# Altium PCB PCB1.PcbDoc
Units mm, origin at the board's own origin, x right, y up, seen from the top; angles counter-clockwise.
Board outline 50 x 100 mm, 2 copper layers (Top Layer, Bottom Layer); 95 components, 45 nets, 266 pads, 16 vias.
Unrouted connection lines stored in the file: 4.
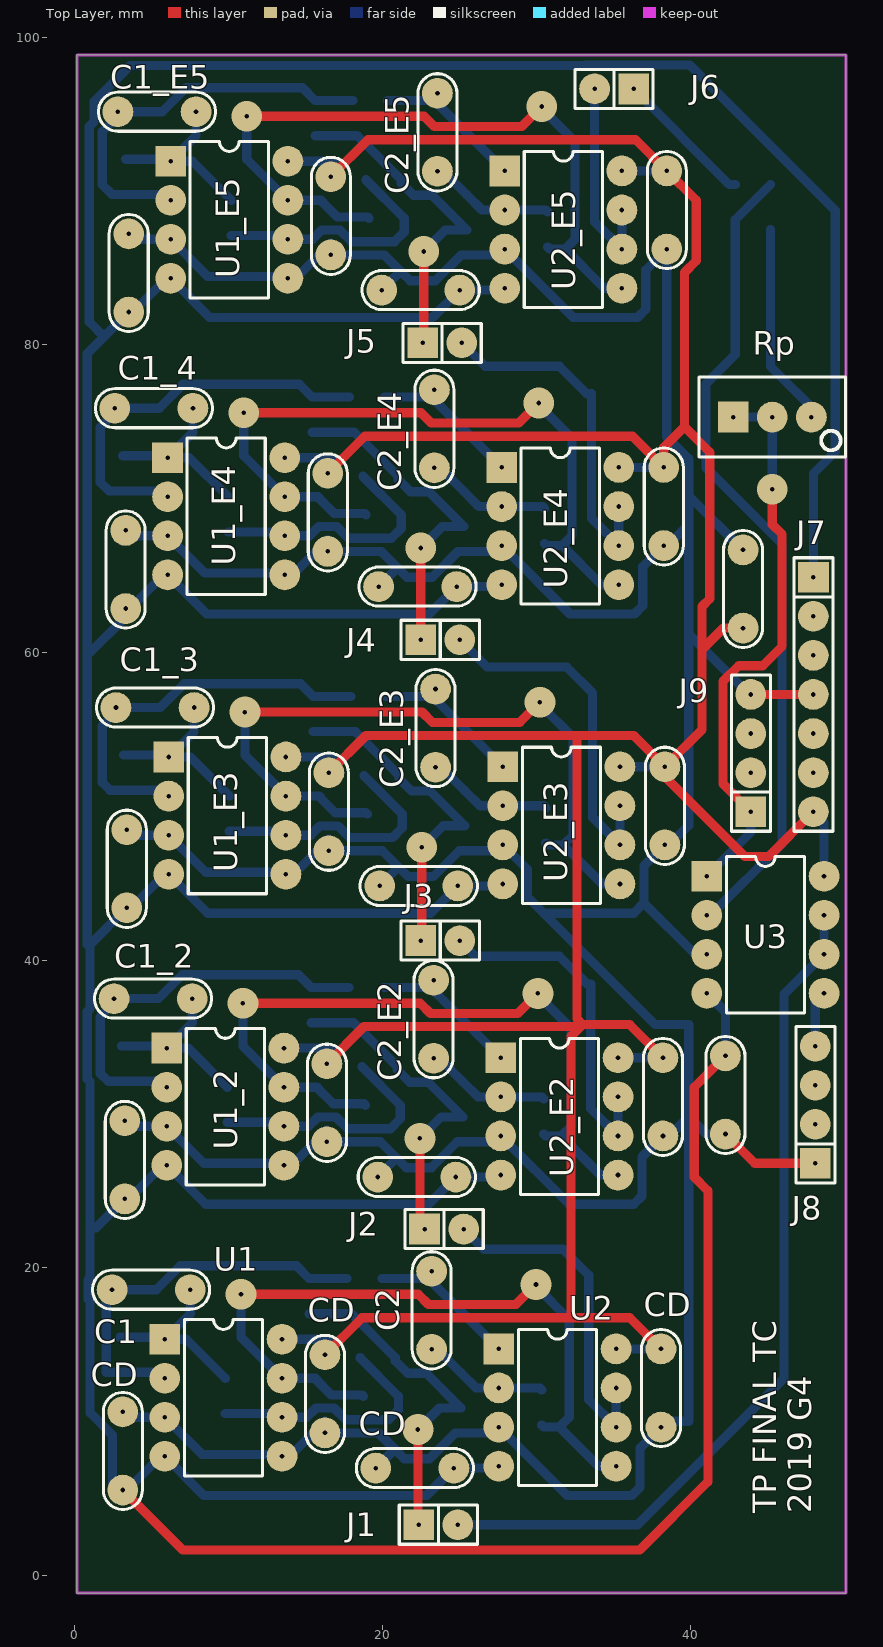
[diagram p0: Top Layer view]
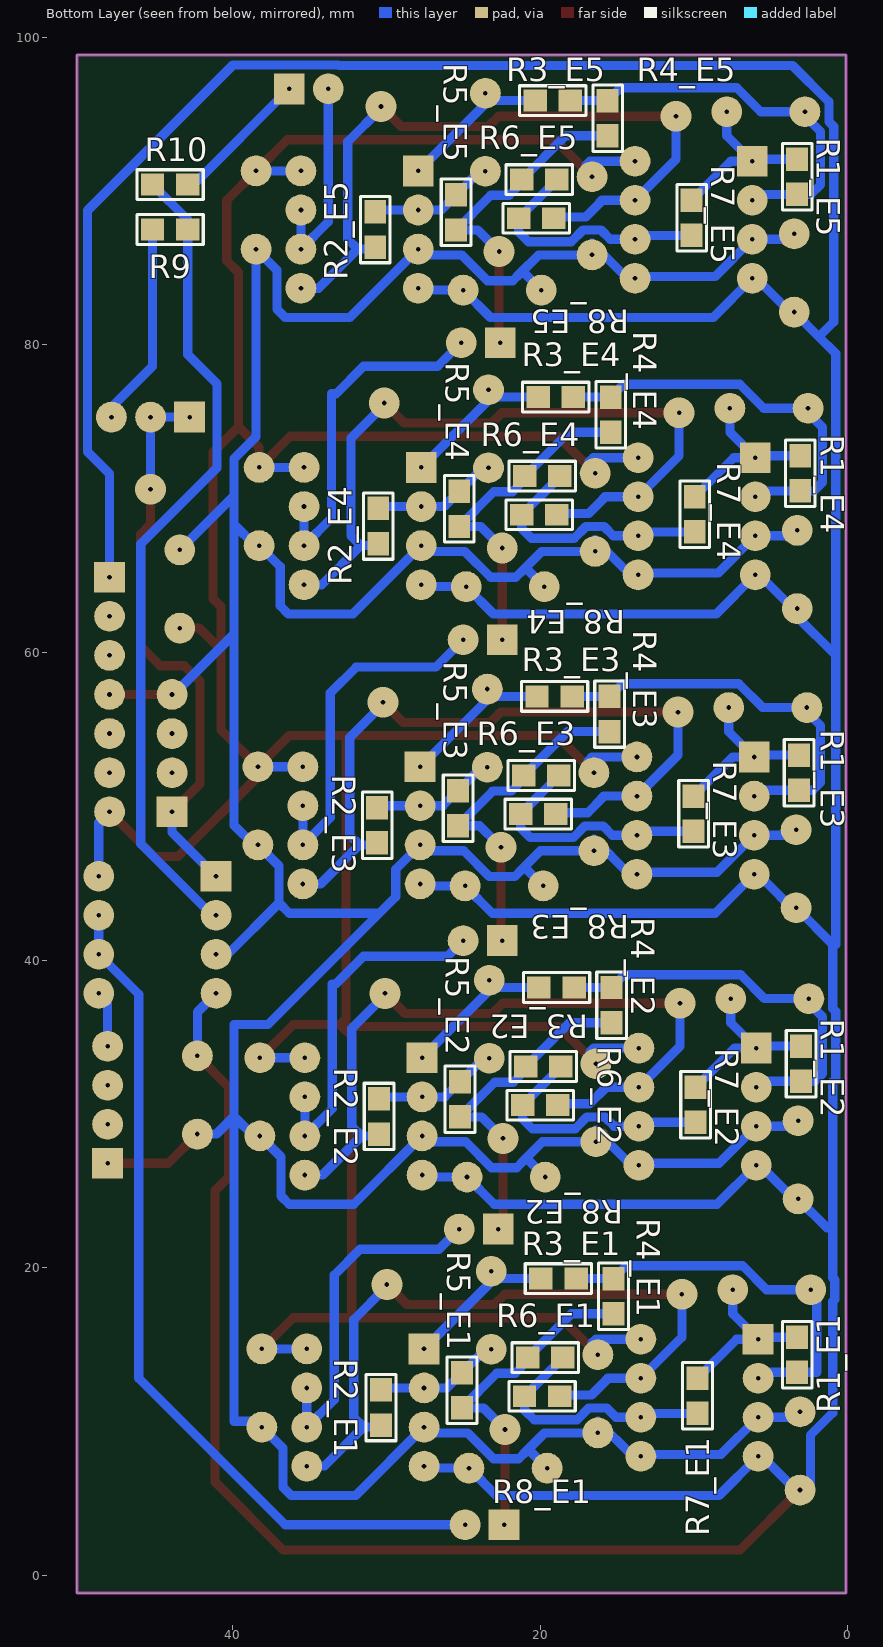
[diagram p1: Bottom Layer view, seen from below]
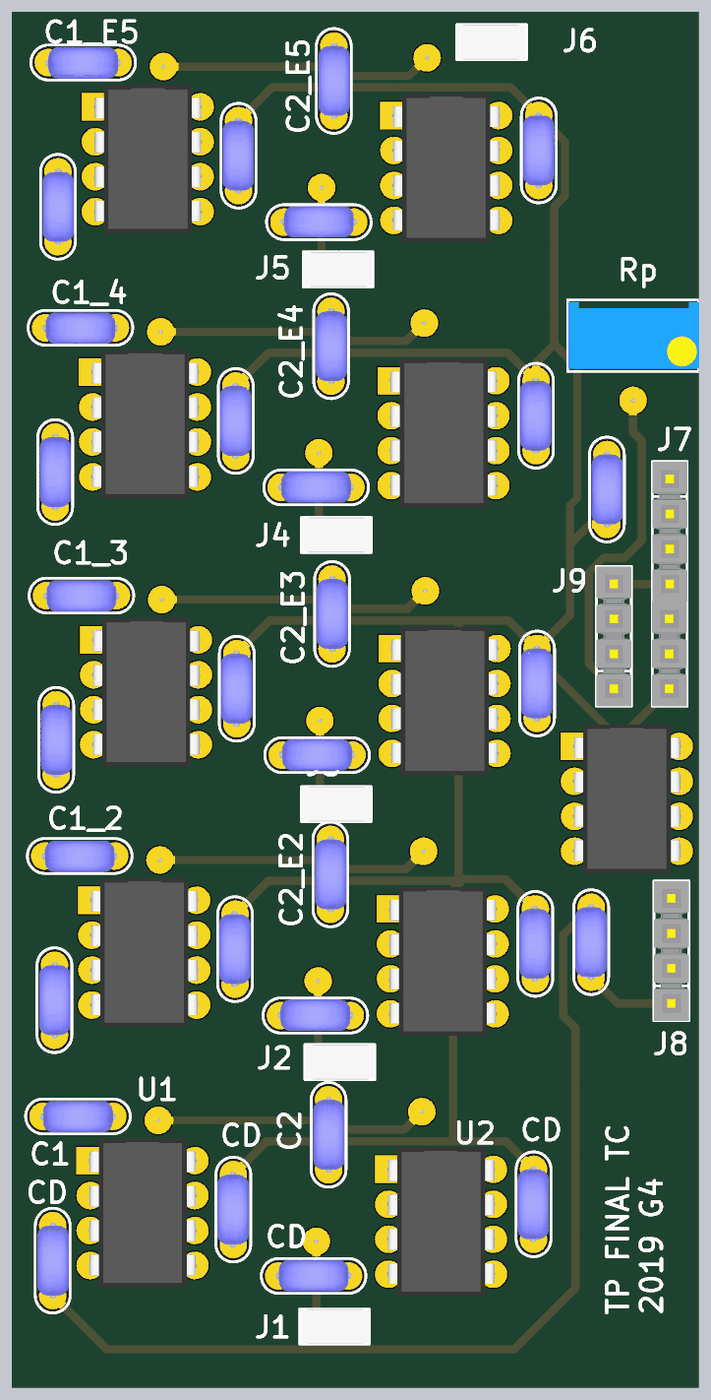
[diagram p2: 3D render of the assembled board from above, using the file's embedded part models]
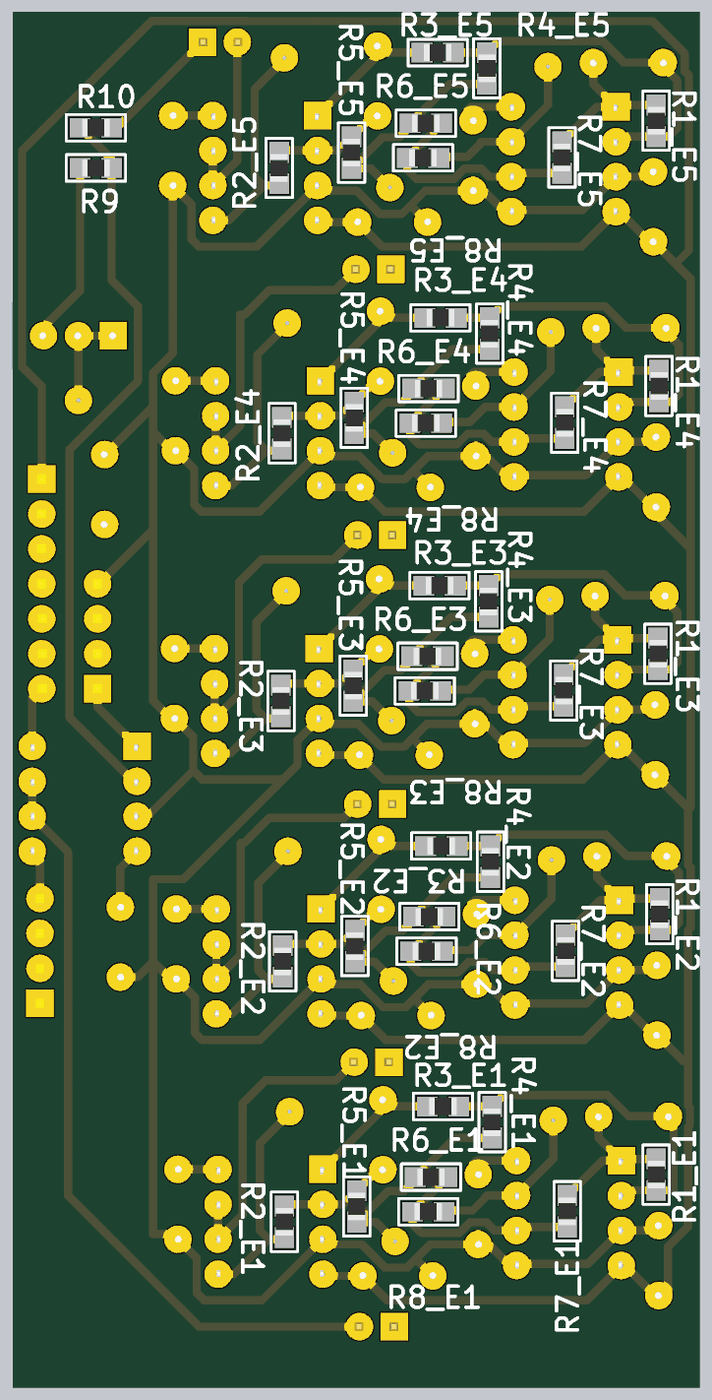
[diagram p3: 3D render of the assembled board from below, using the file's embedded part models]

## Layer stack, top to bottom
Top Solder: solder mask 0.0102, Solder Resist, Dk 3.5
Top Layer: signal copper 0.0356
Dielectric 1: dielectric 0.32, FR-4, Dk 4.8
Bottom Layer: signal copper 0.0356
Bottom Solder: solder mask 0.0102, Solder Resist, Dk 3.5

## Board outline
0.127,-1.143 0.127,98.857 50.127,98.857 50.127,-1.143

## Design rules (kind name [scope] priority, off if disabled: settings)
Clearance [All] p1: gap=0.254 ignorepadtopadclearanceinfootprint=FALSE except(0: Arc-Hole Track-Hole SMDPad-Hole THPad-Hole Via-Hole Fill-Hole Poly-Hole Region-Hole Text-Hole)
PolygonConnect [All] p1: connectstyle=Relief reliefconductorwidth=0.254 reliefentries=4 polygonreliefangle="90 Angle" airgapwidth=0.254
RoomDefinition E5 [InComponentClass('E5')] p1: confinementstyle=ConfineIn formatcopy=TRUE lockcomponents=FALSE outline 0.889,79.375 40.64,79.375 40.64,97.79 0.889,97.79
RoomDefinition E4 [InComponentClass('E4')] p2: confinementstyle=ConfineIn formatcopy=TRUE lockcomponents=FALSE outline 0.889,60.738 40.64,60.738 40.64,79.216 0.889,79.216
RoomDefinition E3 [InComponentClass('E3')] p3: confinementstyle=ConfineIn formatcopy=TRUE lockcomponents=FALSE outline 0.762,41.084 40.513,41.084 40.513,59.055 0.762,59.055
RoomDefinition E2 [InComponentClass('E2')] p4: confinementstyle=ConfineIn formatcopy=TRUE lockcomponents=FALSE outline 0.635,22.066 40.386,22.066 40.386,40.164 0.635,40.164
RoomDefinition E1 [InComponentClass('E1')] p5: confinementstyle=ConfineIn formatcopy=FALSE lockcomponents=FALSE outline 0.635,2.794 40.386,2.794 40.386,21.336 0.635,21.336
RoutingVias [All] p1: holewidth=0.711 width=1.27 viastyle="Through Hole" minholewidth=0.711 minwidth=1.27 maxholewidth=0.711 maxwidth=1.27
SolderMaskExpansion [All] p1: expansion=0.102
Width [All] p1: maxlimit=0.6 minlimit=0.6 preferedwidth=0.6
30 further rules are at their usual default settings.

## Classes and differential pairs
channel class universal_flech: E1 E2 E3 E4 E5
component class Esquemático: J1 J2 J3 J4 J5 J6 J7 J8 J9 R9 R10 Rp U3 ""
component class E5: C1_E5 C2_E5 R1_E5 R2_E5 R3_E5 R4_E5 R5_E5 R6_E5 R7_E5 R8_E5 U1_E5 U2_E5 ""
component class E4: C1_4 C2_E4 R1_E4 R2_E4 R3_E4 R4_E4 R5_E4 R6_E4 R7_E4 R8_E4 U1_E4 U2_E4 ""
component class E3: C1_3 C2_E3 R1_E3 R2_E3 R3_E3 R4_E3 R5_E3 R6_E3 R7_E3 R8_E3 U1_E3 U2_E3 ""
component class E2: C1_2 C2_E2 CD R1_E2 R2_E2 R3_E2 R4_E2 R5_E2 R6_E2 R7_E2 R8_E2 U1 U2_E2 ""
component class E1: C1 C2 CD R1_E1 R2_E1 R3_E1 R4_E1 R5_E1 R6_E1 R7_E1 R8_E1 U1 U2 ""

## Components (designator, comment, footprint, x,y, rotation, side; value= is the part's Value field where it differs from the comment)
C1 "10n" CAP200 4.953,18.581 r0 top
C1_2 "10n" CAP200 5.08,37.504 r0 top (schematic designator C1)
C1_3 "10n" CAP200 5.207,56.427 r0 top (schematic designator C1)
C1_4 "10n" CAP200 5.134,75.887 r0 top (schematic designator C1)
C1_E5 "10n" CAP200 5.334,95.162 r0 top (schematic designator C1)
C2 "10n" CAP200 23.187,17.244 r90 top
C2_E2 "10n" CAP200 23.314,36.167 r90 top (schematic designator C2)
C2_E3 "10n" CAP200 23.441,55.09 r90 top (schematic designator C2)
C2_E4 "10n" CAP200 23.368,74.549 r90 top (schematic designator C2)
C2_E5 "10n" CAP200 23.568,93.825 r90 top (schematic designator C2)
CD "CAP" CAP200 38.1,12.192 r270 top (schematic designator CD4)
CD "CAP" CAP200 16.256,11.811 r270 top (schematic designator CD3)
CD "CAP" CAP200 22.098,6.985 r180 top (schematic designator CD2)
CD "CAP" CAP200 3.116,8.1 r90 top (schematic designator CD1)
CD1 "CAP" CAP200 42.291,31.242 r270 top
CD1 "CAP" CAP200 3.497,84.681 r90 top
CD1 "CAP" CAP200 3.297,65.405 r90 top
CD1 "CAP" CAP200 3.37,45.946 r90 top
CD1 "CAP" CAP200 3.243,27.023 r90 top
CD2 "CAP" CAP200 43.434,64.135 r90 top
CD2 "CAP" CAP200 22.479,83.566 r180 top
CD2 "CAP" CAP200 22.279,64.29 r180 top
CD2 "CAP" CAP200 22.352,44.831 r180 top
CD2 "CAP" CAP200 22.225,25.908 r180 top
CD3 "CAP" CAP200 16.637,88.392 r270 top
CD3 "CAP" CAP200 16.437,69.116 r270 top
CD3 "CAP" CAP200 16.51,49.657 r270 top
CD3 "CAP" CAP200 16.383,30.734 r270 top
CD4 "CAP" CAP200 38.481,88.773 r270 top
CD4 "CAP" CAP200 38.281,69.497 r270 top
CD4 "CAP" CAP200 38.354,50.038 r270 top
CD4 "CAP" CAP200 38.227,31.115 r270 top
J1 "JUMPER" JUMPER2 23.622,3.302 r0 top
J2 "JUMPER" JUMPER2 24.003,22.524 r0 top
J3 "JUMPER" JUMPER2 23.749,41.275 r0 top
J4 "JUMPER" JUMPER2 23.749,60.833 r0 top
J5 "JUMPER" JUMPER2 23.876,80.137 r0 top
J6 "JUMPER" JUMPER2 35.052,96.647 r180 top
J7 "CON7" SIP7 48.006,64.897 r270 top
J8 "CON4" SIP4 48.133,30.607 r90 top
J9 "CON4" SIP4 43.942,53.467 r90 top
R1_E1 "5k6" 0805 3.302,14.351 r90 bottom (schematic designator R1)
R1_E2 "5k6" 0805 3.048,33.274 r90 bottom (schematic designator R1)
R1_E3 "5k6" 0805 3.175,52.197 r90 bottom (schematic designator R1)
R1_E4 "5k6" 0805 3.102,71.656 r90 bottom (schematic designator R1)
R1_E5 "5k6" 0805 3.302,90.932 r90 bottom (schematic designator R1)
R2_E1 "1k5" 0805 30.353,10.922 r90 bottom (schematic designator R2)
R2_E2 "1k5" 0805 30.48,29.845 r90 bottom (schematic designator R2)
R2_E3 "1k5" 0805 30.607,48.768 r90 bottom (schematic designator R2)
R2_E4 "1k5" 0805 30.534,68.227 r90 bottom (schematic designator R2)
R2_E5 "1k5" 0805 30.734,87.503 r90 bottom (schematic designator R2)
R3_E1 "1k" 0805 18.818,19.304 r0 bottom (schematic designator R3)
R3_E2 "1k" 0805 18.945,38.227 r0 bottom (schematic designator R3)
R3_E3 "1k" 0805 19.072,57.15 r0 bottom (schematic designator R3)
R3_E4 "1k" 0805 18.999,76.609 r0 bottom (schematic designator R3)
R3_E5 "1k" 0805 19.199,95.885 r0 bottom (schematic designator R3)
R4_E1 "10k" 0805 15.24,18.161 r90 bottom (schematic designator R4)
R4_E2 "10k" 0805 15.367,37.084 r90 bottom (schematic designator R4)
R4_E3 "10k" 0805 15.494,56.007 r90 bottom (schematic designator R4)
R4_E4 "10k" 0805 15.421,75.466 r90 bottom (schematic designator R4)
R4_E5 "10k" 0805 15.621,94.742 r90 bottom (schematic designator R4)
R5_E1 "inf" 0805 25.092,12.037 r90 bottom (schematic designator R5)
R5_E2 "inf" 0805 25.219,30.96 r90 bottom (schematic designator R5)
R5_E3 "inf" 0805 25.346,49.883 r90 bottom (schematic designator R5)
R5_E4 "inf" 0805 25.273,69.342 r90 bottom (schematic designator R5)
R5_E5 "inf" 0805 25.473,88.618 r90 bottom (schematic designator R5)
R6_E1 "1k8" 0805 19.685,14.167 r180 bottom (schematic designator R6)
R6_E2 "1k8" 0805 19.812,33.09 r180 bottom (schematic designator R6)
R6_E3 "1k8" 0805 19.939,52.013 r180 bottom (schematic designator R6)
R6_E4 "1k8" 0805 19.866,71.473 r180 bottom (schematic designator R6)
R6_E5 "1k8" 0805 20.066,90.748 r180 bottom (schematic designator R6)
R7_E1 "1k" 0805 9.779,11.684 r270 bottom (schematic designator R7)
R7_E2 "1k" 0805 9.906,30.607 r270 bottom (schematic designator R7)
R7_E3 "1k" 0805 10.033,49.53 r270 bottom (schematic designator R7)
R7_E4 "1k" 0805 9.96,68.989 r270 bottom (schematic designator R7)
R7_E5 "1k" 0805 10.16,88.265 r270 bottom (schematic designator R7)
R8_E1 "1k" 0805 19.885,11.656 r180 bottom (schematic designator R8)
R8_E2 "1k" 0805 20.012,30.579 r180 bottom (schematic designator R8)
R8_E3 "1k" 0805 20.139,49.502 r180 bottom (schematic designator R8)
R8_E4 "1k" 0805 20.066,68.961 r180 bottom (schematic designator R8)
R8_E5 "1k" 0805 20.266,88.237 r180 bottom (schematic designator R8)
R9 "RES" 0805 44.069,87.503 r0 bottom
R10 "RES" 0805 44.069,90.424 r0 bottom
Rp "PRESET" "PRESET V" 45.339,75.311 r0 top
U1 "TL082" DIP8 5.842,15.367 r0 top
U1_2 "TL082" DIP8 5.969,34.29 r0 top (schematic designator U1)
U1_E3 "TL082" DIP8 6.096,53.213 r0 top (schematic designator U1)
U1_E4 "TL082" DIP8 6.023,72.672 r0 top (schematic designator U1)
U1_E5 "TL082" DIP8 6.223,91.948 r0 top (schematic designator U1)
U2 "TL082" DIP8 27.559,14.732 r0 top
U2_E2 "TL082" DIP8 27.686,33.655 r0 top (schematic designator U2)
U2_E3 "TL082" DIP8 27.813,52.578 r0 top (schematic designator U2)
U2_E4 "TL082" DIP8 27.74,72.037 r0 top (schematic designator U2)
U2_E5 "TL082" DIP8 27.94,91.313 r0 top (schematic designator U2)
U3 "LM833" DIP8 41.08,45.466 r0 top

## Footprints (in the part's own frame and the unit in brackets; to place one, negate y for a bottom-side part, rotate by r counter-clockwise, add the part's x,y. Pads: shape width x height; smd on the part's side, far side on the other; paste and mask are expansions set on the pad)
0805 [mil] "Pasivo 0805"
  rect 60x56 smd: 1(-45,0) 2(45,0)
  silkscreen extent -85,-38 85,38, body extent -39,-24 39,25, height 15
CAP200 [mm]
  round 2 hole 0.3: 1(-2.54,0) 2(2.54,0)
  silkscreen extent -3.81,-1.27 3.81,1.27, body extent -2.79,-1.17 2.79,1.12, height 6.24
DIP8 [mm]
  rect 2x2 hole 0.3: 1(0,0)
  round 2 hole 0.3: 2(0,-2.54) 3(0,-5.08) 4(0,-7.62) 5(7.62,-7.62) 6(7.62,-5.08) 7(7.62,-2.54) 8(7.62,0)
  silkscreen extent 1.27,-8.89 6.35,1.27, body extent -0.06,-9.21 7.7,1.59, height 4.5
JUMPER2 [mm]
  rect 2x2 hole 0.3: 1(-1.27,0)
  round 2 hole 0.3: 2(1.27,0)
  silkscreen extent -2.54,-1.27 2.54,1.27, body extent -2.46,-1.27 2.54,1.27, height 9.5
"PRESET V" [mm]
  rect 2x2 hole 0.3: 1(-2.54,0)
  round 2 hole 0.3: 2(0,0) 3(2.54,0)
  silkscreen extent -4.76,-2.6 4.76,2.6, body extent -4.7,-2.42 4.83,2.42, height 11.55
SIP4 [mm]
  rect 2x2 hole 0.3: 1(-3.81,0)
  round 2 hole 0.3: 2(-1.27,0) 3(1.27,0) 4(3.81,0)
  silkscreen extent -5.08,-1.27 5.08,1.27, body extent -5.08,-1.27 5.08,1.27, height 8.38
SIP7 [mm]
  rect 2x2 hole 0.3: 1(0,0)
  round 2 hole 0.3: 2(2.54,0) 3(5.08,0) 4(7.62,0) 5(10.16,0) 6(12.7,0) 7(15.24,0)
  silkscreen extent -1.27,-1.27 16.51,1.27, body extent -1.27,-1.3 16.51,1.27, height 8.38

## Part data
C1 C1_2 C1_3 C1_4 C1_E5 C2 C2_E2 C2_E3 C2_E4 C2_E5: library part CAP
R1_E1 R1_E2 R1_E3 R1_E4 R1_E5 R2_E1 R2_E2 R2_E3 R2_E4 R2_E5 R3_E1 R3_E2 R3_E3 R3_E4 R3_E5 R4_E1 R4_E2 R4_E3 R4_E4 R4_E5 R5_E1 R5_E2 R5_E3 R5_E4 R5_E5 R6_E1 R6_E2 R6_E3 R6_E4 R6_E5 R7_E1 R7_E2 R7_E3 R7_E4 R7_E5 R8_E1 R8_E2 R8_E3 R8_E4 R8_E5: library part RES
U1 U1_2 U1_E3 U1_E4 U1_E5 U2 U2_E2 U2_E3 U2_E4 U2_E5: library part LM833, "Dual Audio Operational Amplifier"
U3: "Dual Audio Operational Amplifier"

## Via types
v1: diameter 2, hole 0.3, Top Layer to Bottom Layer, 16 vias

## Nets (pads, with @x,y where several pads share a name; then routed paths per layer and width w, separated by ;. In a path a pad name is that pad's centre, name@x,y a point inside that pad or via, vN(x,y) a via of type N, cw(c..) or ccw(c..) an arc to the next point about the centre after c; other vN are vias at no path point)
GND: CD1.2 CD2.2 CD3.2 CD4.2 CD.2 J7.4 J8.1 J9.4 U1.3 U1.5 U1_2.3 U1_2.5 U1_E3.3 U1_E3.5 U1_E4.3 U1_E4.5 U1_E5.3 U1_E5.5 U2.3 U2_E2.3 U2_E3.3 U2_E4.3 U2_E5.3 U3.3 | length 345
  Top Layer w0.6: CD1.2@42.291,28.702 44.196,26.797 J8.1 ; J9.4 J7.4
  Bottom Layer w0.6: CD.2@2.794,10.033 3.048,10.287 U1.3 8.255,7.874 13.335,7.874 U1.5 13.97,7.747 CD.2@16.256,10.033 ; CD1.2@2.921,28.956 3.175,29.21 U1_2.3 8.382,26.797 13.462,26.797 U1_2.5 14.097,26.67 CD3.2@16.383,28.956 ; CD1.2@2.975,67.338 3.229,67.592 U1_E4.3 8.436,65.179 13.516,65.179 U1_E4.5 14.151,65.052 CD3.2@16.437,67.338 ; CD1.2@3.048,47.879 3.302,48.133 U1_E3.3 8.509,45.72 13.589,45.72 U1_E3.5 14.224,45.593 CD3.2@16.51,47.879 ; CD1.2@3.175,86.614 3.429,86.868 U1_E5.3 8.636,84.455 13.716,84.455 U1_E5.5 14.351,84.328 CD3.2@16.637,86.614 ; CD.2@16.256,9.271 19.73,9.271 20.901,8.1 ; CD3.2@16.383,28.194 19.857,28.194 21.028,27.023 ; CD3.2@16.437,66.576 19.911,66.576 21.082,65.405 ; CD3.2@16.51,47.117 19.984,47.117 21.155,45.946 ; CD3.2@16.637,85.852 20.111,85.852 21.282,84.681 ; CD.2@19.558,6.985 20.673,8.1 20.901,8.1 ; CD2.2@19.685,25.908 20.8,27.023 21.028,27.023 ; CD2.2@19.739,64.29 20.853,65.405 21.082,65.405 ; CD2.2@19.812,44.831 20.927,45.946 21.155,45.946 ; CD2.2@19.939,83.566 21.054,84.681 21.282,84.681 ; U3.3 40.319,40.386 36.987,43.718 ; CD1.2@42.291,28.702 41.051,28.702 39.908,29.845 ; CD2.2@43.434,66.675 39.908,70.201 ; J9.4 43.845,57.277 39.908,61.214 ; 20.901,8.1 21.409,7.592 23.047,7.592 24.726,9.271 27.178,9.271 U2.3 32.004,5.207 36.195,5.207 36.733,5.745 36.733,8.285 38.1,9.652 38.481,10.033 39.908,10.033 39.908,29.845 ; 21.028,27.023 21.536,26.515 23.174,26.515 24.853,28.194 27.305,28.194 U2_E2.3 32.131,24.13 36.322,24.13 36.86,24.668 36.86,27.208 38.227,28.575 38.638,28.575 39.908,29.845 ; 21.082,65.405 21.59,64.897 23.228,64.897 24.907,66.576 27.359,66.576 U2_E4.3 32.185,62.512 36.376,62.512 36.914,63.05 36.914,65.59 38.281,66.957 38.539,66.957 39.908,68.326 ; 21.155,45.946 21.663,45.438 23.301,45.438 24.98,47.117 27.432,47.117 U2_E3.3 29.4,45.91 29.4,44.133 30.48,43.053 ; 21.282,84.681 21.79,84.173 23.428,84.173 25.107,85.852 27.559,85.852 U2_E5.3 32.385,81.788 36.576,81.788 37.114,82.326 37.114,84.866 38.481,86.233 38.481,74.035 39.908,72.608 39.908,70.201 ; 30.48,43.053 37.719,35.814 39.908,35.814 39.908,29.845 ; 30.48,43.053 36.322,43.053 36.987,43.718 ; 36.987,43.718 36.987,46.131 38.354,47.498 38.638,47.498 39.908,48.768 39.908,61.214 ; 39.908,61.214 39.908,68.326 ; 39.908,68.326 39.908,70.201
INPUT: J8.4 U3.5 | length 3.7
  Bottom Layer w0.6: J8.4 48.133,37.279 U3.5
NetC1_E1_1: C1.1 R1_E1.1 R3_E1.1 R4_E1.2 U1.2 | length 25.7
  Bottom Layer w0.6: U1.2 5.461,13.208 R1_E1.1 2.032,13.208 2.032,18.2 C1.1 5.295,18.581 6.849,20.135 14.409,20.135 R4_E1.2 R3_E1.1
NetC1_E1_2: C1.2 R1_E1.2 R7_E1.1 U1.1 | length 11.9
  Bottom Layer w0.6: R1_E1.2@2.921,15.494 5.715,15.494 U1.1 ; C1.2 7.493,17.018 U1.1 ; R7_E1.1 7.239,15.367 U1.1
NetC1_E2_1: C1_2.1 R1_E2.1 R3_E2.1 R4_E2.2 U1_2.2 | length 26.2
  Bottom Layer w0.6: U1_2.2 5.588,32.131 R1_E2.1 2.159,32.131 1.651,32.639 1.651,36.322 2.54,37.211 C1_2.1 5.422,37.504 6.976,39.058 14.536,39.058 R4_E2.2 R3_E2.1
NetC1_E2_2: C1_2.2 R1_E2.2 R7_E2.1 U1_2.1 | length 11.9
  Bottom Layer w0.6: R1_E2.2 5.842,34.417 U1_2.1 ; C1_2.2 7.62,35.941 U1_2.1 ; R7_E2.1 7.366,34.29 U1_2.1
NetC1_E3_1: C1_3.1 R1_E3.1 R3_E3.1 R4_E3.2 U1_E3.2 | length 26.2
  Bottom Layer w0.6: U1_E3.2 5.715,51.054 R1_E3.1 2.286,51.054 1.778,51.562 1.778,55.245 2.667,56.134 C1_3.1 5.549,56.427 7.103,57.981 14.663,57.981 R4_E3.2 R3_E3.1
NetC1_E3_2: C1_3.2 R1_E3.2 R7_E3.1 U1_E3.1 | length 11.9
  Bottom Layer w0.6: R1_E3.2 5.969,53.34 U1_E3.1 ; C1_3.2 7.747,54.864 U1_E3.1 ; R7_E3.1 7.493,53.213 U1_E3.1
NetC1_E4_1: C1_4.1 R1_E4.1 R3_E4.1 R4_E4.2 U1_E4.2 | length 26.2
  Bottom Layer w0.6: U1_E4.2 5.642,70.513 R1_E4.1 2.213,70.513 1.651,71.075 1.651,74.651 2.594,75.593 C1_4.1 5.476,75.887 7.03,77.441 14.589,77.441 R4_E4.2 R3_E4.1
NetC1_E4_2: C1_4.2 R1_E4.2 R7_E4.1 U1_E4.1 | length 11.9
  Bottom Layer w0.6: R1_E4.2 5.896,72.799 U1_E4.1 ; C1_4.2 7.674,74.323 U1_E4.1 ; R7_E4.1 7.42,72.672 U1_E4.1
NetC1_E5_1: C1_E5.1 R1_E5.1 R3_E5.1 R4_E5.2 U1_E5.2 | length 26.3
  Bottom Layer w0.6: U1_E5.2 5.842,89.789 R1_E5.1 2.413,89.789 1.778,90.424 1.778,93.853 2.794,94.869 C1_E5.1 5.676,95.162 7.23,96.716 14.79,96.716 R4_E5.2 R3_E5.1
NetC1_E5_2: C1_E5.2 R1_E5.2 R7_E5.1 U1_E5.1 | length 11.9
  Bottom Layer w0.6: R1_E5.2 6.096,92.075 U1_E5.1 ; C1_E5.2 7.874,93.599 U1_E5.1 ; R7_E5.1 7.62,91.948 U1_E5.1
NetC2_E1_1: C2.1 R2_E1.2 R5_E1.2 U2.2 | length 8.3
  Bottom Layer w0.6: C2.1 23.568,14.704 R5_E1.2 26.08,12.192 U2.2 30.226,12.192 R2_E1.2
NetC2_E1_2: C2.2 R3_E1.2 U2.1 | length 10.4
  Bottom Layer w0.6: R3_E1.2 23.241,19.304 23.368,19.431 23.368,18.923 U2.1 U2.1@27.94,15.113
NetC2_E2_1: C2_E2.1 R2_E2.2 R5_E2.2 U2_E2.2 | length 8.3
  Bottom Layer w0.6: C2_E2.1 23.695,33.627 R5_E2.2 26.207,31.115 U2_E2.2 30.353,31.115 R2_E2.2
NetC2_E2_2: C2_E2.2 R3_E2.2 U2_E2.1 | length 10.4
  Bottom Layer w0.6: R3_E2.2 23.368,38.227 23.495,38.354 23.495,37.846 U2_E2.1 U2_E2.1@28.067,34.036
NetC2_E3_1: C2_E3.1 R2_E3.2 R5_E3.2 U2_E3.2 | length 8.3
  Bottom Layer w0.6: C2_E3.1 23.822,52.55 R5_E3.2 26.334,50.038 U2_E3.2 30.48,50.038 R2_E3.2
NetC2_E3_2: C2_E3.2 R3_E3.2 U2_E3.1 | length 10.4
  Bottom Layer w0.6: R3_E3.2 23.495,57.15 23.622,57.277 23.622,56.769 U2_E3.1 U2_E3.1@28.194,52.959
NetC2_E4_1: C2_E4.1 R2_E4.2 R5_E4.2 U2_E4.2 | length 8.3
  Bottom Layer w0.6: C2_E4.1 23.749,72.009 R5_E4.2 26.261,69.497 U2_E4.2 30.407,69.497 R2_E4.2
NetC2_E4_2: C2_E4.2 R3_E4.2 U2_E4.1 | length 10.4
  Bottom Layer w0.6: R3_E4.2 23.422,76.609 23.549,76.736 23.549,76.228 U2_E4.1 U2_E4.1@28.121,72.418
NetC2_E5_1: C2_E5.1 R2_E5.2 R5_E5.2 U2_E5.2 | length 8.3
  Bottom Layer w0.6: C2_E5.1 23.949,91.285 R5_E5.2 26.461,88.773 U2_E5.2 30.607,88.773 R2_E5.2
NetC2_E5_2: C2_E5.2 R3_E5.2 U2_E5.1 | length 10.4
  Bottom Layer w0.6: R3_E5.2 23.622,95.885 23.749,96.012 23.749,95.504 U2_E5.1 U2_E5.1@28.321,91.694
NetJ1_1: J1.1 R4_E1.1 R5_E1.1 R6_E1.1 | length 21
  Top Layer w0.6: J1.1@22.298,4.036 v1(22.298,9.497)
  Bottom Layer w0.6: R4_E1.1 17.977,17.018 R6_E1.1 20.828,13.955 21.633,13.15 22.836,13.15 R5_E1.1 23.695,10.894 v1@22.552,9.751
NetJ2_1: J2.1 R4_E2.1 R5_E2.1 R6_E2.1 | length 21
  Top Layer w0.6: J2.1@22.425,22.959 v1(22.425,28.42)
  Bottom Layer w0.6: R4_E2.1 18.104,35.941 R6_E2.1 20.955,32.878 21.76,32.073 22.963,32.073 R5_E2.1 23.822,29.817 v1@22.679,28.674
NetJ2_2: J2.2 U2.6 U2.7 | length 22.5
  Bottom Layer w0.6: J2.2 26.588,21.209 31.722,21.209 33.401,19.53 33.401,11.43 U2.6 U2.7
NetJ3_1: J3.1 R4_E3.1 R5_E3.1 R6_E3.1 | length 21
  Top Layer w0.6: J3.1@22.552,41.882 v1(22.552,47.343)
  Bottom Layer w0.6: R4_E3.1 18.231,54.864 R6_E3.1 21.082,51.801 21.887,50.996 23.09,50.996 R5_E3.1 23.949,48.74 v1@22.806,47.597
NetJ3_2: J3.2 U2_E2.6 U2_E2.7 | length 22.8
  Bottom Layer w0.6: J3.2 26.035,40.259 31.496,40.259 33.302,38.453 33.528,38.453 33.528,30.353 U2_E2.6 U2_E2.7
NetJ4_1: J4.1 R4_E4.1 R5_E4.1 R6_E4.1 | length 21
  Top Layer w0.6: J4.1@22.479,61.341 v1(22.479,66.802)
  Bottom Layer w0.6: R4_E4.1 18.158,74.323 R6_E4.1 21.009,71.26 21.814,70.455 23.017,70.455 R5_E4.1 23.876,68.199 v1@22.733,67.056
NetJ4_2: J4.2 U2_E3.6 U2_E3.7 | length 23.2
  Bottom Layer w0.6: J4.2 26.797,59.055 31.976,59.055 33.655,57.376 33.655,49.276 U2_E3.6 U2_E3.7
NetJ5_1: J5.1 R4_E5.1 R5_E5.1 R6_E5.1 | length 21
  Top Layer w0.6: J5.1@22.679,80.617 v1(22.679,86.078)
  Bottom Layer w0.6: R4_E5.1 18.358,93.599 R6_E5.1 21.209,90.536 22.014,89.731 23.217,89.731 R5_E5.1 24.076,87.475 v1@22.933,86.332
NetJ5_2: J5.2 U2_E4.6 U2_E4.7 | length 23
  Bottom Layer w0.6: J5.2 26.67,78.613 31.496,78.613 33.274,76.835 33.582,76.835 33.582,68.735 U2_E4.6 U2_E4.7
NetJ6_2: J6.2 U2_E5.6 U2_E5.7 | length 13.2
  Bottom Layer w0.6: J6.2@33.782,96.111 33.782,88.011 U2_E5.6 U2_E5.7
NetR6_E1_2: R6_E1.2 R7_E1.2 R8_E1.1 U1.6 | length 16.6
  Bottom Layer w0.6: R7_E1.2 13.208,10.541 U1.6 15.074,10.287 15.674,10.887 16.844,10.887 17.606,10.125 20.387,10.125 21.028,10.767 R8_E1.1 18.542,14.142 R6_E1.2
NetR6_E2_2: R6_E2.2 R7_E2.2 R8_E2.1 U1_2.6 | length 16.6
  Bottom Layer w0.6: R7_E2.2 13.335,29.464 U1_2.6 15.201,29.21 15.801,29.81 16.971,29.81 17.733,29.048 20.514,29.048 21.155,29.69 R8_E2.1 18.669,33.065 R6_E2.2
NetR6_E3_2: R6_E3.2 R7_E3.2 R8_E3.1 U1_E3.6 | length 16.6
  Bottom Layer w0.6: R7_E3.2 13.462,48.387 U1_E3.6 15.328,48.133 15.928,48.733 17.098,48.733 17.86,47.971 20.641,47.971 21.282,48.613 R8_E3.1 18.796,51.988 R6_E3.2
NetR6_E4_2: R6_E4.2 R7_E4.2 R8_E4.1 U1_E4.6 | length 16.6
  Bottom Layer w0.6: R7_E4.2 13.389,67.846 U1_E4.6 15.255,67.592 15.855,68.192 17.025,68.192 17.787,67.43 20.567,67.43 21.209,68.072 R8_E4.1 18.723,71.447 R6_E4.2
NetR6_E5_2: R6_E5.2 R7_E5.2 R8_E5.1 U1_E5.6 | length 16.6
  Bottom Layer w0.6: R7_E5.2 13.589,87.122 U1_E5.6 15.455,86.868 16.055,87.468 17.225,87.468 17.987,86.706 20.768,86.706 21.409,87.348 R8_E5.1 18.923,90.723 R6_E5.2
NetR9_1: R9.1 R10.2 U3.2 | length 53.5
  Bottom Layer w0.6: U3.2 41.323,42.926 45.974,47.577 45.974,67.056 41.021,72.009 41.021,77.47 42.926,79.375 R9.1 42.926,88.138 R10.2
NetR9_2: R9.2 Rp.3 | length 13.6
  Bottom Layer w0.6: R9.2 45.212,78.613 Rp.3@48.514,75.311
out1: R2_E1.1 R2_E2.1 R2_E3.1 R2_E4.1 R2_E5.1 R8_E1.2 R8_E2.2 R8_E3.2 R8_E4.2 R8_E5.2 U1.7 U1_2.7 U1_E3.7 U1_E4.7 U1_E5.7 U2.5 U2_E2.5 U2_E3.5 U2_E4.5 U2_E5.5 | length 243.1
  Top Layer w0.6: v1(10.795,18.288) 22.313,18.288 22.983,17.618 28.667,17.618 v1(29.972,18.923) ; v1(10.922,37.211) 22.44,37.211 23.11,36.541 28.794,36.541 v1(30.099,37.846) ; v1(10.976,75.593) 22.494,75.593 23.164,74.923 28.848,74.923 v1(30.153,76.228) ; v1(11.049,56.134) 22.567,56.134 23.237,55.464 28.921,55.464 v1(30.226,56.769) ; v1(11.176,94.869) 22.694,94.869 23.364,94.199 29.048,94.199 v1(30.353,95.504)
  Bottom Layer w0.6: v1@10.795,18.034 10.795,15.494 U1.7 15.621,12.827 15.748,12.7 ; v1@10.922,36.957 10.922,34.417 U1_2.7 15.748,31.75 15.875,31.623 ; v1@10.976,75.339 10.976,72.799 U1_E4.7 15.802,70.132 15.929,70.005 ; v1@11.049,55.88 11.049,53.34 U1_E3.7 15.875,50.673 16.002,50.546 ; v1@11.176,94.615 11.176,92.075 U1_E5.7 16.002,89.408 16.129,89.281 ; 15.602,12.808 16.668,11.741 18.657,11.741 R8_E1.2 ; 15.729,31.731 16.795,30.664 18.784,30.664 R8_E2.2 ; 15.782,70.113 16.849,69.046 18.838,69.046 R8_E4.2 ; 15.856,50.654 16.922,49.587 18.911,49.587 R8_E3.2 ; 15.983,89.389 17.049,88.322 19.038,88.322 R8_E5.2 ; v1(29.972,18.923) 29.972,18.796 32.131,16.637 32.131,10.287 31.496,9.652 ; v1(30.099,37.846) 30.099,37.719 32.258,35.56 32.258,29.21 31.623,28.575 ; v1(30.153,76.228) 30.153,76.101 32.312,73.942 32.312,67.592 31.677,66.957 ; v1(30.226,56.769) 30.226,56.642 32.385,54.483 32.385,48.133 31.75,47.498 ; R2_E1.1 30.48,9.652 31.496,9.652 ; v1(30.353,95.504) 30.353,95.377 32.512,93.218 32.512,86.868 31.877,86.233 ; R2_E2.1 30.607,28.575 31.623,28.575 ; R2_E4.1 30.661,66.957 31.677,66.957 ; R2_E3.1 30.734,47.498 31.75,47.498 ; R2_E5.1 30.861,86.233 31.877,86.233 ; U2.5 34.036,7.112 31.496,9.652 ; U2_E2.5 34.163,26.035 31.623,28.575 ; U2_E4.5 34.217,64.417 31.677,66.957 ; U2_E3.5 34.29,44.958 31.75,47.498 ; U2_E5.5 34.417,83.693 31.877,86.233
"OUT E": J6.1 R10.1 | length 9.2
  Bottom Layer w0.6: J6.1 42.545,90.424 R10.1
"OUT PCB": J9.1 Rp.1 Rp.2 U3.1 | length 36.5
  Top Layer w0.6: J9.1 42.129,51.47 42.129,58.131 43.15,59.152 44.713,59.152 45.974,60.413 45.974,67.691 45.339,68.326 v1(45.339,70.612)
  Bottom Layer w0.6: U3.1 43.942,48.328 J9.1 ; Rp.1@43.434,75.311 Rp.2 v1(45.339,70.612)
"TO E": J1.2 U3.6 U3.7 | length 56.3
  Bottom Layer w0.6: J1.2 36.576,3.302 46.101,12.827 46.101,37.787 U3.6 U3.7
VCC: CD2.1@43.434,61.595 CD3.1 CD4.1 CD.1@16.256,14.351 CD.1@38.1,14.732 J7.7 U1.8 U1_2.8 U1_E3.8 U1_E4.8 U1_E5.8 U2.8 U2_E2.8 U2_E3.8 U2_E4.8 U2_E5.8 U3.8 | length 254
  Top Layer w0.6: CD.1@16.256,14.351 18.669,16.764 32.258,16.764 ; CD3.1@16.383,33.274 18.796,35.687 32.893,35.687 ; CD3.1@16.437,71.656 18.85,74.069 36.249,74.069 38.281,72.037 38.281,73.333 39.624,74.676 ; CD3.1@16.51,52.197 18.923,54.61 32.639,54.61 ; CD3.1@16.637,90.932 19.05,93.345 36.449,93.345 38.481,91.313 40.386,89.408 40.386,85.471 39.624,84.709 39.624,74.676 ; CD.1@38.1,14.732 36.068,16.764 32.258,16.764 ; CD4.1@38.227,33.655 36.068,35.814 33.02,35.814 ; CD2.1@43.434,61.595 42.164,61.595 40.767,60.198 ; J7.7 45.085,46.736 43.561,46.736 38.354,51.943 CD4.1@38.354,52.578 ; 32.258,16.764 32.258,35.052 32.893,35.687 ; 32.639,54.61 36.322,54.61 CD4.1@38.354,52.578 ; 32.639,54.61 32.639,36.195 33.02,35.814 ; 32.893,35.687 33.02,35.814 ; CD4.1@38.354,52.578 40.767,54.991 40.767,60.198 ; 39.624,74.676 41.275,73.025 41.275,63.5 40.767,62.992 40.767,60.198
  Bottom Layer w0.6: U1.8 16.383,15.367 CD.1@16.637,15.113 ; U1_2.8 16.51,34.29 CD3.1@16.764,34.036 ; U1_E4.8 16.564,72.672 CD3.1@16.818,72.418 ; U1_E3.8 16.637,53.213 CD3.1@16.891,52.959 ; U1_E5.8 16.764,91.948 CD3.1@17.018,91.694 ; U2.8 CD.1@38.1,14.732 ; U2_E2.8 CD4.1@38.227,33.655 ; U2_E4.8 CD4.1@38.281,72.037 ; U2_E3.8 CD4.1@38.354,52.578 ; U2_E5.8 CD4.1@38.481,91.313 ; J7.7 48.7,48.963 U3.8
VEE: CD1.1 CD2.1@24.765,25.908 CD2.1@24.819,64.29 CD2.1@24.892,44.831 CD2.1@25.019,83.566 CD.1@3.116,5.56 CD.1@24.638,6.985 J7.1 U1.4 U1_2.4 U1_E3.4 U1_E4.4 U1_E5.4 U2.4 U2_E2.4 U2_E3.4 U2_E4.4 U2_E5.4 U3.4 | length 396.9
  Top Layer w0.6: CD.1@3.116,5.56 7.025,1.651 36.703,1.651 41.148,6.096 41.148,25.019 40.259,25.908 40.259,31.75 42.291,33.782 CD1.1@42.291,33.274
  Bottom Layer w0.6: 0.797,41.021 0.797,59.817 ; CD.1@2.794,4.953 5.588,7.747 U1.4 8.382,5.207 22.86,5.207 24.638,6.985 27.432,6.985 U2.4 ; CD1.1@2.921,23.876 5.715,26.67 U1_2.4 8.509,24.13 22.987,24.13 24.765,25.908 27.559,25.908 U2_E2.4 ; CD1.1@3.048,42.799 5.842,45.593 U1_E3.4 8.636,43.053 23.114,43.053 24.892,44.831 27.686,44.831 U2_E3.4 ; CD.1@3.116,5.56 2.441,5.56 2.441,9.117 0.985,10.573 0.985,17.811 0.859,17.938 0.859,19.225 0.985,19.351 0.985,22.606 ; CD1.1@3.175,81.534 5.969,84.328 U1_E5.4 8.763,81.788 23.241,81.788 25.019,83.566 27.813,83.566 U2_E5.4 ; CD1.1@3.243,24.483 1.366,22.606 0.985,22.606 ; CD1.1@3.297,62.865 CD1.1@3.297,62.58 ; CD1.1@3.37,43.406 0.985,41.021 0.985,36.864 0.797,36.676 0.797,32.285 0.985,32.097 0.985,22.606 ; CD1.1@3.497,82.141 1.89,80.533 ; U2_E4.4 27.613,64.29 24.819,64.29 23.041,62.512 8.563,62.512 U1_E4.4 5.769,65.052 CD1.1@3.297,62.58 ; U3.4 42.291,36.635 CD1.1@42.291,33.782 ; J7.1 48.006,71.628 49.433,73.055 49.433,88.743 39.975,98.201 33.138,98.201 33.108,98.171 3.605,98.171 1.24,95.806 1.24,94.523 0.924,94.207 0.924,81.499 1.89,80.533 ; 0.797,59.817 3.297,62.317 CD1.1@3.297,62.58 ; 0.797,59.817 0.797,79.441 1.89,80.533
pads on no net: J7.2 J7.3 J7.5 J7.6 J8.2 J8.3 J9.2 J9.3

## Keep-outs
Keep-Out Layer:
  the board outline again, w0.2

## Silkscreen, mask and mechanical layers (free items; w line width, h text height)
Top Overlay:
  text "TP FINAL TC / 2019 G4" at 47.879,4.064 h1.52 r90